# Altium PCB board.PcbDoc
Units mm, origin at the board's own origin, x right, y up, seen from the top; angles counter-clockwise.
Board outline 27 x 75 mm, 2 copper layers (Top Layer, Bottom Layer), stack 0.97 mm thick; 32 components, 35 nets, 168 pads, 13 vias.
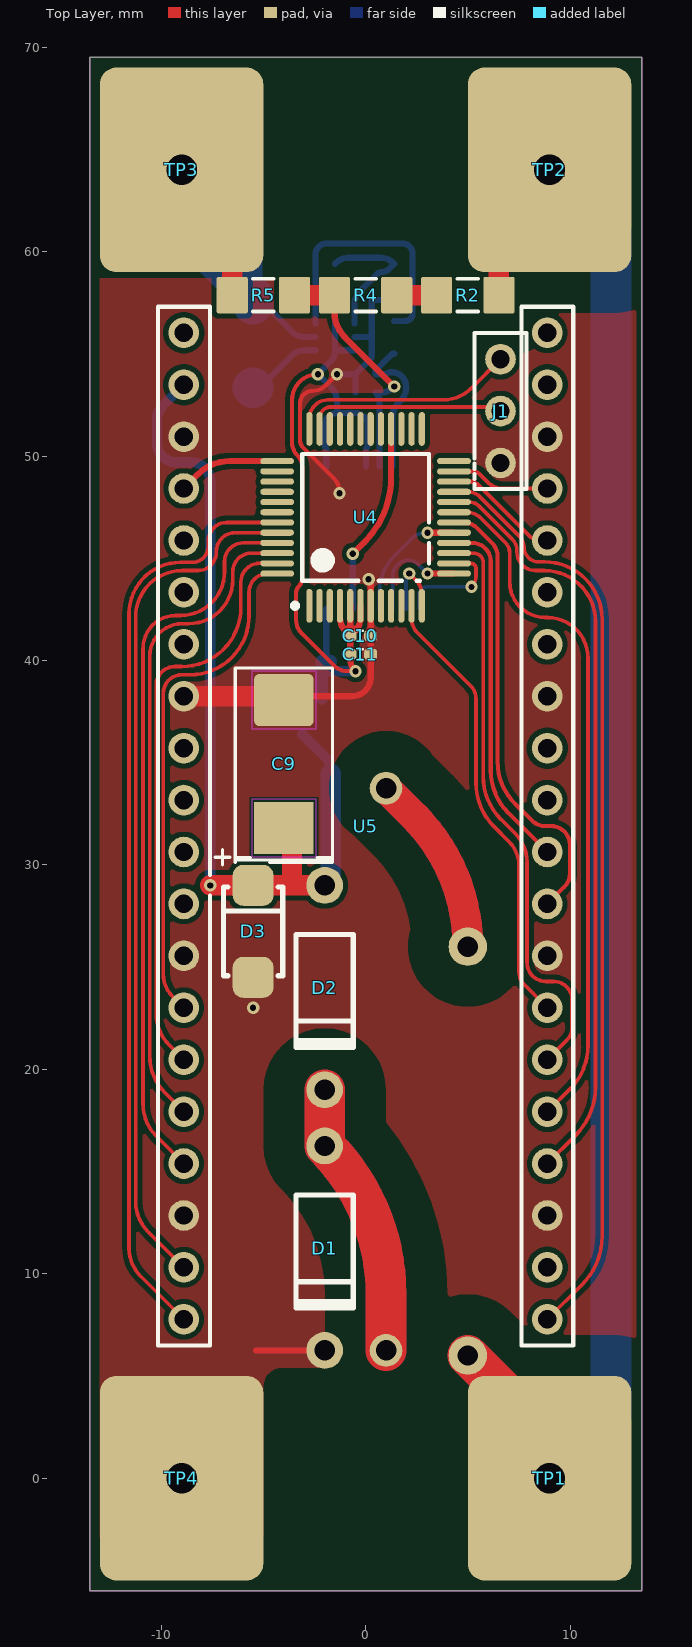
[diagram p0: Top Layer view]
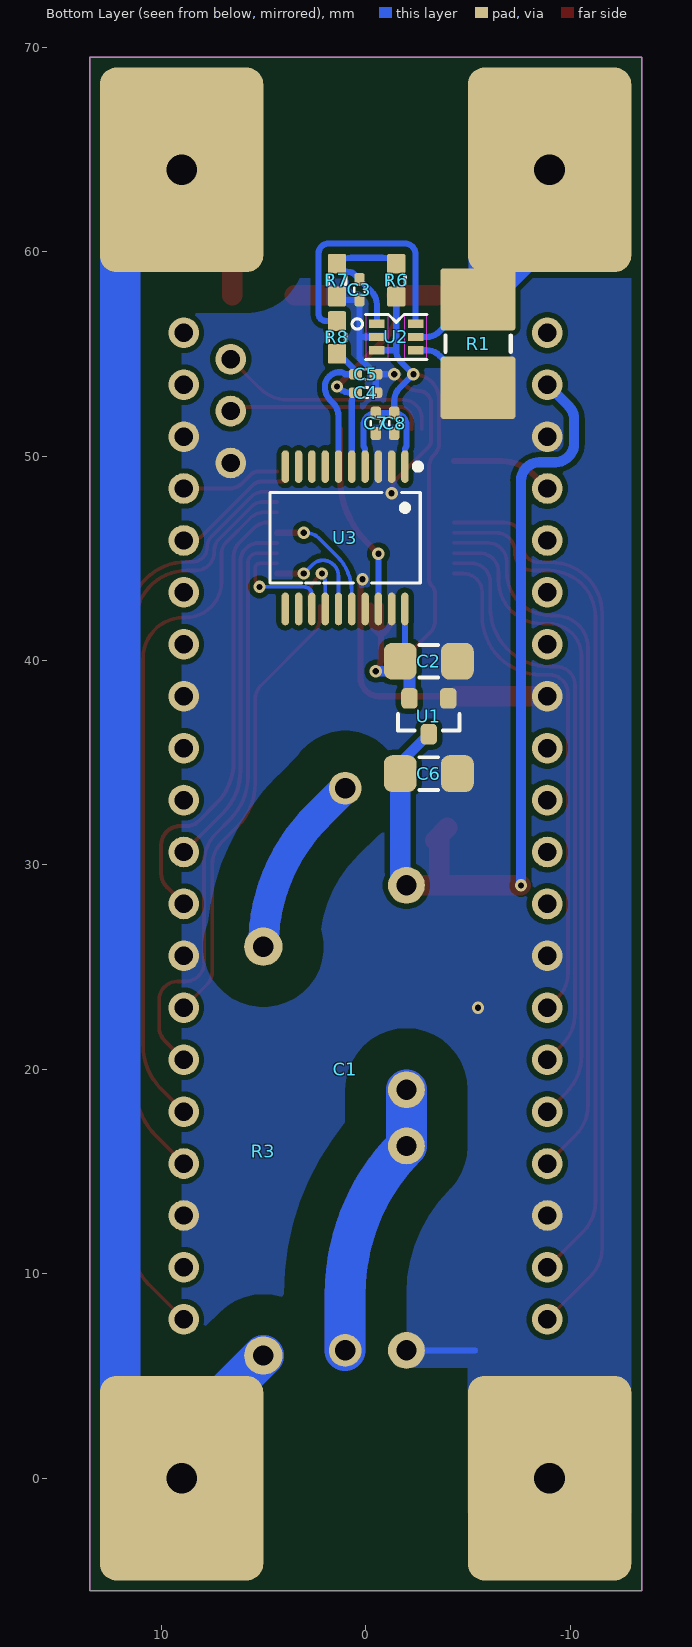
[diagram p1: Bottom Layer view, seen from below]
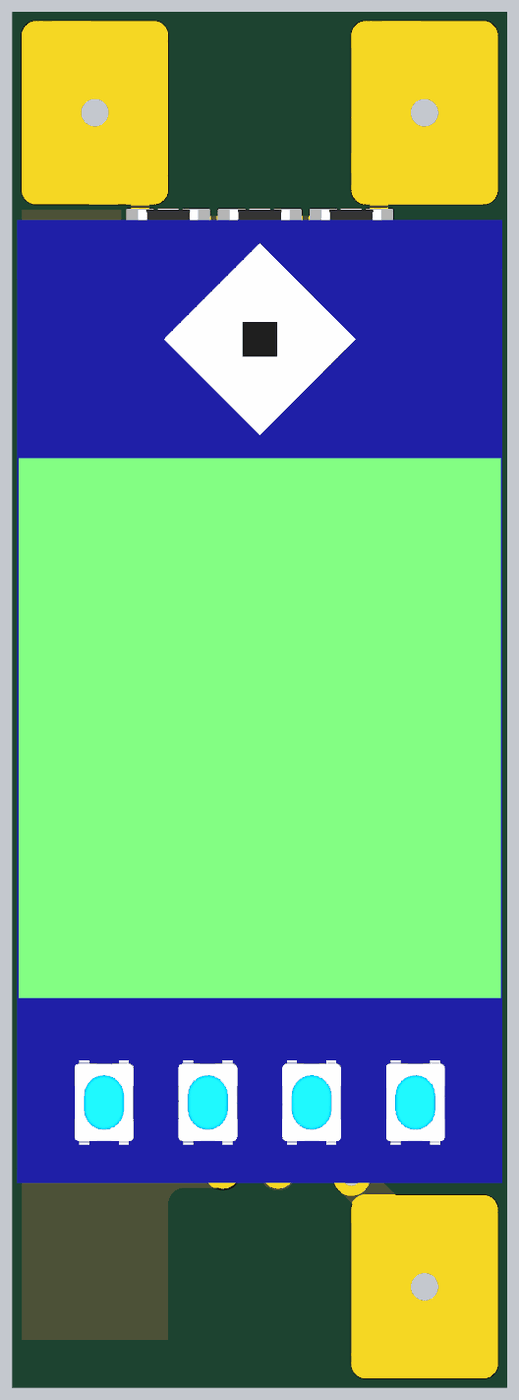
[diagram p2: 3D render of the assembled board from above, using the file's embedded part models]
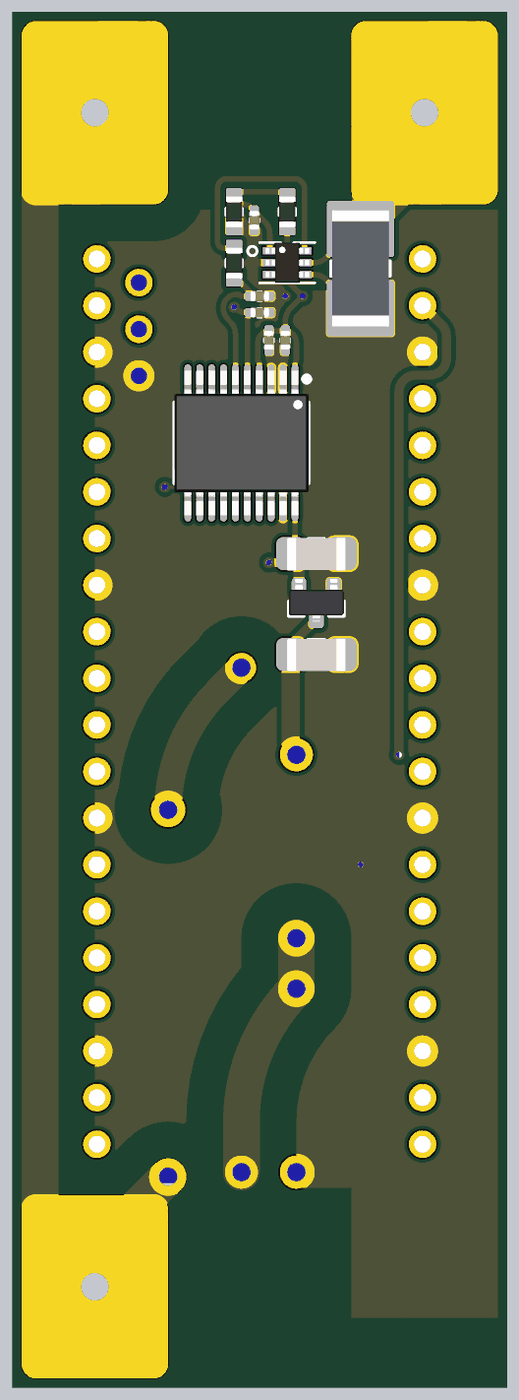
[diagram p3: 3D render of the assembled board from below, using the file's embedded part models]

## Layer stack, top to bottom
Top Solder: solder mask 0.0127, Solder Resist, Dk 3.8
Top Layer: signal copper 0.035
Dielectric: core 0.9, FR-4, Dk 4.5
Bottom Layer: signal copper 0.035
Bottom Solder: solder mask 0.0127, Solder Resist, Dk 3.8

## Board outline
-13.5,-5.5 -13.5,69.5 13.5,69.5 13.5,-5.5

## Design rules (kind name [scope] priority, off if disabled: settings)
AcuteAngle [All] p1: minimum=6.00000000000000E+0001 checktracksonly=FALSE
Clearance Clearance_1 [InNetClass('220')] p1: gap=2 ignorepadtopadclearanceinfootprint=FALSE except(0.13: Arc-Arc Arc-Track Arc-SMDPad Arc-Via Track-Track Track-SMDPad Track-Via SMDPad-SMDPad SMDPad-Via THPad-Via Via-Via; 0.15: Arc-THPad Arc-Text Arc-Hole Track-THPad Track-Text Track-Hole SMDPad-THPad SMDPad-Text SMDPad-Hole THPad-THPad THPad-Text THPad-Hole Via-Text Via-Hole Fill-Text Fill-Hole Poly-Text Poly-Hole Region-Text Region-Hole Text-Text Text-Hole)
Clearance [All] p2: gap=0.25 ignorepadtopadclearanceinfootprint=FALSE except(0.13: Arc-Arc Arc-Track Arc-SMDPad Arc-Via Track-Track Track-SMDPad Track-Via SMDPad-SMDPad SMDPad-Via THPad-Via Via-Via; 0.15: Arc-THPad Arc-Text Arc-Hole Track-THPad Track-Text Track-Hole SMDPad-THPad SMDPad-Text SMDPad-Hole THPad-THPad THPad-Text THPad-Hole Via-Text Via-Hole Fill-Text Fill-Hole Poly-Text Poly-Hole Region-Text Region-Hole Text-Text Text-Hole)
ComponentClearance ComponentClearance_1 [HasFootprint('HDR-1X3')] p1: gap=-1 collisioncheckmode=3 verticalgap=2540 showdistances=FALSE
ComponentClearance ComponentClearance_2 [HasFootprint('TP2030_SMD')] p2: gap=-1 collisioncheckmode=3 verticalgap=2540 showdistances=FALSE
ComponentClearance [All] p3: gap=0.3 collisioncheckmode=3 verticalgap=0.254 showdistances=FALSE
HoleSize [All] p1: absolutevalues=TRUE maxlimit=6 minlimit=0.2 maxpercent=80.000 minpercent=20.000
HoleToHoleClearance HoleToHoleClearance_1 [IsVia vs IsThruPin] p1: gap=0.7 allowstackedmicrovias=TRUE
HoleToHoleClearance [All] p2: gap=0.5 allowstackedmicrovias=TRUE
MinimumSolderMaskSliver [All] p1 off: minsoldermaskwidth=0.254
PlaneClearance [All] p1: clearance=0.45
PlaneConnect [All] p1: planeconnectstyle=Direct reliefexpansion=0.3 reliefentries=4 reliefconductorwidth=0.381 reliefairgap=0.178
PolygonConnect [All] p1: connectstyle=Direct reliefconductorwidth=0.381 reliefentries=4 polygonreliefangle="90 Angle" airgapwidth=0.356
RoutingVias [All] p1: holewidth=0.3 width=0.6 viastyle="Through Hole" minholewidth=0.2 minwidth=0.45 maxholewidth=0.9 maxwidth=1.27
SilkToSilkClearance [All] p1 off: silktosilkclearance=0.254
SilkToSolderMaskClearance [IsPad] p1 off: minsilkscreentomaskgap=0.254 clearancetoexposedcopper=TRUE
SolderMaskExpansion [All] p1: expansion=0.102 istentingtop=FALSE
UnRoutedNet [All] p1: checkbadconnections=TRUE
Width [All] p1: maxlimit=3.81 minlimit=0.14 preferedwidth=0.254
21 further rules are at their usual default settings.

## Classes and differential pairs
net class 220: NetC1_1 NetC1_2 NetR2_1 NetR2_2

## Components (designator, comment, footprint, x,y, rotation, side; value= is the part's Value field where it differs from the comment)
C1 "100nF" CAP-TH_27,5 1,20 r90 bottom
C2 "10uF" C1206 -3.094,39.965 r0 bottom
C3 "100nF" C0402 0.3,58.135 r90 bottom
C4 "100nF" C0402 0,53.1 r0 bottom
C5 "100nF" C0402 0,54 r0 bottom
C6 "10uF" C1206 -3.094,34.465 r0 bottom
C7 "100nF" C0402 -0.5,51.6 r90 bottom
C8 "100nF" C0402 -1.4,51.6 r90 bottom
C9 "100uF" C7343 -4,35 r90 top
C10 "100nF" C0402 -0.25,41.2 r180 top
C11 "100nF" C0402 -0.25,40.3 r180 top
D1 "" DO-41 -2,11.25 r90 top
D2 "" DO-41 -2,24 r90 top
D3 "" SMA -5.5,26.75 r90 top
J1 "SWD" HDR-1X3 6.6,52.2 r0 top
R1 "" R2512-WIDE -5.5,55.5 r270 bottom
R2 "" R1206 5,57.87 r0 top
R3 "" RES-TH_20 5,16 r270 bottom
R4 "" R1206 0,57.87 r0 top
R5 "" R1206 -5,57.87 r0 top
R6 "" R0603 -1.5,58.6 r270 bottom
R7 "" R0603 1.4,58.6 r90 bottom
R8 "" R0603 1.4,55.8 r90 bottom
TP1 "" TP2030_SMD#1 15,0 r90 top
TP2 "" TP2030_SMD#2 5,64 r90 top
TP3 "" TP2030_SMD#3 -9,64 r90 top
TP4 "" TP2030_SMD#4 -8,-12 r90 top
U1 "XC6206P332MR" SOT-23 -3.094,37.269 r90 bottom
U2 "INA199A2" SOT-363 -1.5,55.825 r270 bottom
U3 "MCP3561-E/ST" SSOP-20 1,46 r0 bottom
U4 "STM32G030C8T6" LQFP-48 0,47 r90 top
U5 "19650 WAVESHARE" DISP_19650_WS 0,31.9 r0 top

## Footprints (in the part's own frame and the unit in brackets; to place one, negate y for a bottom-side part, rotate by r counter-clockwise, add the part's x,y. Pads: shape width x height; smd on the part's side, far side on the other; paste and mask are expansions set on the pad)
C0402 [mm] "Chip Capacitor Body"
  rrect50% 0.635x0.508 smd mask+0.05: 1(-0.5,0) 2(0.5,0)
  silkscreen extent -0.1,-0.25 0.1,0.25, body extent -0.52,-0.27 0.53,0.28, height 0.55
C1206 [mm] "Chip Capacitor"
  rrect50% 1.6x1.8 smd: 1(-1.4,0) 2(1.4,0)
  silkscreen extent -0.45,-0.8 0.45,0.8, body extent -1.6,-0.88 1.6,0.92, height 1.6
C7343 [mm] "C7343_1"
  rect 2.55x2.9 smd: 1(-3.188,0)
  rrect20% 2.55x2.9 smd: 2(3.061,0)
  Top Layer keep-out region: 1.659,1.577 1.659,-1.577 4.464,-1.577 4.464,1.577
  Top Layer keep-out region: -4.591,1.577 -4.591,-1.577 -1.786,-1.577 -1.786,1.577
  silkscreen extent -5,-2.37 4.64,3.37, body extent -3.7,-2.22 3.7,2.22, height 3.01
CAP-TH_27,5 [mm]
  round 1.6 hole 1: 1(-13.75,0) 2(13.75,0)
DISP_19650_WS [mm]
  round 1.5 hole 0.9: 1(8.89,24.13) 2(8.89,21.59) 3(8.89,19.05) 4(8.89,16.51) 5(8.89,13.97) 6(8.89,11.43) 7(8.89,8.89) 8(8.89,6.35) 9(8.89,3.81) 10(8.89,1.27) 11(8.89,-1.27) 12(8.89,-3.81) 13(8.89,-6.35) 14(8.89,-8.89) 15(8.89,-11.43) 16(8.89,-13.97) 17(8.89,-16.51) 18(8.89,-19.05) 19(8.89,-21.59) 20(8.89,-24.13) 21(-8.89,-24.13) 22(-8.89,-21.59) 23(-8.89,-19.05) 24(-8.89,-16.51) 25(-8.89,-13.97) 26(-8.89,-11.43) 27(-8.89,-8.89) 28(-8.89,-6.35) 29(-8.89,-3.81) 30(-8.89,-1.27) 31(-8.89,1.27) 32(-8.89,3.81) 33(-8.89,6.35) 34(-8.89,8.89) 35(-8.89,11.43) 36(-8.89,13.97) 37(-8.89,16.51) 38(-8.89,19.05) 39(-8.89,21.59) 40(-8.89,24.13)
  silkscreen extent -10.16,-25.4 10.16,25.4, body extent -13.25,-26.25 13.25,26.25, height 18.24
DO-41 [mm]
  round 1.8 hole 1: 1(-5,0) 2(5,0)
  silkscreen extent -2.92,-1.4 2.6,1.4
HDR-1X3 [mm]
  round 1.5 hole 0.9: 1(0,2.54) 2(0,0) 3(0,-2.54)
  silkscreen extent -1.27,-3.81 1.27,3.81
LQFP-48 [mm]
  oval 1.65x0.3 smd: 1(-4.325,2.75) 2(-4.325,2.25) 3(-4.325,1.75) 4(-4.325,1.25) 5(-4.325,0.75) 6(-4.325,0.25) 7(-4.325,-0.25) 8(-4.325,-0.75) 9(-4.325,-1.25) 10(-4.325,-1.75) 11(-4.325,-2.25) 12(-4.325,-2.75) 25(4.325,-2.75) 26(4.325,-2.25) 27(4.325,-1.75) 28(4.325,-1.25) 29(4.325,-0.75) 30(4.325,-0.25) 31(4.325,0.25) 32(4.325,0.75) 33(4.325,1.25) 34(4.325,1.75) 35(4.325,2.25) 36(4.325,2.75)
  oval 0.3x1.65 smd: 13(-2.75,-4.325) 14(-2.25,-4.325) 15(-1.75,-4.325) 16(-1.25,-4.325) 17(-0.75,-4.325) 18(-0.25,-4.325) 19(0.25,-4.325) 20(0.75,-4.325) 21(1.25,-4.325) 22(1.75,-4.325) 23(2.25,-4.325) 24(2.75,-4.325) 37(2.75,4.325) 38(2.25,4.325) 39(1.75,4.325) 40(1.25,4.325) 41(0.75,4.325) 42(0.25,4.325) 43(-0.25,4.325) 44(-0.75,4.325) 45(-1.25,4.325) 46(-1.75,4.325) 47(-2.25,4.325) 48(-2.75,4.325)
  silkscreen extent -4.45,-3.1 3.1,3.57, body extent -4.5,-4.5 4.5,4.5, height 1.5
R0603 [mil] "Chip Resistor; Body 1.6 x 0.8 mm (LxW typ)"
  rrect20% 38x35.43 smd mask+1.97: 1(-31.5,0) 2(31.5,0)
  silkscreen extent -7,-17 7,17, body extent -33,-18 33,18, height 22
R1206 [mil] "Chip Resistor"
  rrect10% 60x70 smd mask+1.97: 1(-60,0) 2(60,0)
  silkscreen extent -20,-31 20,31, body extent -65,-33 65,33, height 26
R2512-WIDE [mm] "Chip Resistor; Body 6.4 x 3.2 mm (LxW typ)"
  rrect10% 3.05x3.68 smd mask+0.05: 1(-2.16,0) 2(2.16,0)
  silkscreen extent -0.4,-1.6 0.4,1.6, body extent -3.19,-1.55 3.16,1.55, height 0.55
RES-TH_20 [mm]
  round 1.88 hole 1: 1(-10,0) 2(10,0)
SMA [mm] "SMA(DO-214AC)"
  rrect50% 2x2 smd: 1(-2.25,0) 2(2.25,0)
  silkscreen extent -2.17,-1.45 2.17,1.45, body extent -2.78,-1.48 2.83,1.48, height 2.9
SOT-23 [mm]
  rrect50% 1x0.8 smd mask+0.05: 1(0.875,-0.95) 2(0.875,0.95) 3(-0.875,0)
  silkscreen extent -0.7,-1.5 0.1,1.5, body extent -1.27,-1.5 1.33,1.5, height 1.1
SOT-363 [mil]
  rect 16x30 smd: 1(-25.59,-37.4) 2(0,-37.4) 3(25.59,-37.4) 4(25.59,37.4) 5(0,37.4) 6(-25.59,37.4)
  Top Layer keep-out region: -40.5,59.06 -40.5,15.75 40.5,15.75 40.5,59.06
  Top Layer keep-out region: -40.5,-15.75 -40.5,-59.06 40.5,-59.06 40.5,-15.75
  silkscreen extent -43,-85 43,59, body extent -43,-47 43,47, height 43
SSOP-20 [mm]
  oval 0.364x1.6 smd: 1(-2.925,-3.482) 2(-2.275,-3.482) 3(-1.625,-3.482) 4(-0.975,-3.482) 5(-0.325,-3.482) 6(0.325,-3.482) 7(0.975,-3.482) 8(1.625,-3.482) 9(2.275,-3.482) 10(2.925,-3.482) 11(2.925,3.482) 12(2.275,3.482) 13(1.625,3.482) 14(0.975,3.482) 15(0.325,3.482) 16(-0.325,3.482) 17(-0.975,3.482) 18(-1.625,3.482) 19(-2.275,3.482) 20(-2.925,3.482)
  silkscreen extent -3.71,-3.63 3.68,2.22, body extent -3.66,-3.95 3.66,3.95, height 1.98
TP2030_SMD#1 [mm] "TP30_SMD"
  rrect20% 10x8 hole 1.5 mask+0.05: 1(0,6)
TP2030_SMD#2 [mm] "TP30_SMD"
  rrect20% 10x8 hole 1.5 mask+0.05: 1(0,-4)
TP2030_SMD#3 [mm] "TP30_SMD"
  rrect20% 10x8 hole 1.5 mask+0.05: 1(0,0)
TP2030_SMD#4 [mm] "TP30_SMD"
  rrect20% 10x8 hole 1.5 mask+0.05: 1(12,1)

## Part data
C1 C2 C3 C4 C5 C6 C7 C8 C10 C11: library part CAP
C9: library part 220uF
D1 D2 D3: library part US1M-13-F
J1: library part "Header 3"
R1 R2 R3 R4 R5 R6 R7 R8: library part RES
TP1 TP2 TP3 TP4: library part TP_Dup1
U1: library part Component_4_1
U2: library part MCP65R41T-2402

## Via types
v1: diameter 0.6, hole 0.3, Top Layer to Bottom Layer, tented both sides, 13 vias

## Nets (pads, with @x,y where several pads share a name; then routed paths per layer and width w, separated by ;. In a path a pad name is that pad's centre, name@x,y a point inside that pad or via, vN(x,y) a via of type N, cw(c..) or ccw(c..) an arc to the next point about the centre after c; other vN are vias at no path point)
3V3: C2.2 C7.2 C8.2 C10.2 C11.2 R6.2 U1.2 U2.3 U3.1 U3.4 U3.20 U4.4 U4.5 U4.6 | length 44.4
  Top Layer w0.2: -3.35,50.05 cw(c-3.954,49.446) -3.1,49.446 -3.1,44.012 cw(c-3.612,44.012) -3.25,43.65 ccw(c-2.888,43.288) -3.4,43.288 -3.4,41.979 ccw(c-2.486,41.979) -3.132,41.332 -1.542,39.742 ccw(c-0.896,40.389) -0.896,39.475 v1(-0.499,39.475) ; -3.351,50.051 cw(c-2.746,50.654) -3.6,50.654 -3.6,52.736 cw(c-2.336,52.736) v1(-2.336,54)
  Top Layer w0.3: U4.4 -1.25,42.079 ccw(c-0.336,42.079) -0.982,41.432 C10.2 ; U4.5 C10.2 ; v1(-0.499,39.475) cw(c0.107,40.08) -0.75,40.08 C11.2 C10.2 ; U4.6 -0.25,42.079 cw(c-1.164,42.079) -0.518,41.432 C10.2
  Bottom Layer w0.3: U3.20 -1.925,40.522 ccw(c-1.136,40.522) C2.2 ; U3.1 -1.925,50.326 ccw(c-2.036,50.326) -1.957,50.405 cw(c-1.855,50.507) -2,50.507 -2,51.5 cw(c-1.4,51.5) C8.2 ; R6.2 -1.5,55.175 ; U2.3 -1.5,55.175 ; U3.4 0.025,50.326 cw(c0.136,50.326) 0.057,50.405 ccw(c-0.045,50.507) 0.1,50.507 0.1,51.5 ccw(c-0.5,51.5) C7.2 C8.2 ; -1.5,55.175 -1.5,55.13 cw(c-2.208,55.13) -1.707,54.629 v1(-2.336,54) -1.668,53.331 cw(c-2.314,52.685) -1.4,52.685 C8.2
  Bottom Layer w0.5: C2.2@-2.199,39.475 -2.144,39.475 v1(-0.499,39.475)
  Bottom Layer w0.6: U1.2 -2.144,39.475 -2.144,39.965 C2.2
5V: C6.2 C9.1 D2.2 D3.2 U1.3 U5.39 | length 43.4
  Top Layer w1: v1(-7.6,29) D3.2 D2.2 ; C9.1 C9.1@-3.4,31.212 ; -3.6,29 C9.1@-3.6,31.212
  Bottom Layer w0.5: U5.39 -9.932,52.448 ccw(c-9.286,51.801) -10.2,51.801 -10.2,50.614 ccw(c-9.286,50.614) -9.286,49.7 -8.514,49.7 cw(c-8.514,48.786) -7.6,48.786 v1(-7.6,29) ; U1.3 C6.2@-1.962,35.262 ; C6.2@-1.962,35.262 cw(c-2.608,34.616) -1.694,34.616 C6.2
  Bottom Layer w1: D2.2@-1.962,29.038 ccw(c-2.608,29.685) -1.694,29.685 C6.2
B0: U4.23 U5.4 | length 4.9
  Top Layer w0.2: U4.23 5.238,49.25 cw(c5.238,48.738) 5.6,49.1 6.022,48.678 ccw(c6.669,49.324) 6.669,48.41 U5.4
  Top Layer w0.3: U5.4@8.866,48.4 ccw(c8.866,48.434) U5.4
B1: U4.45 U5.24 | length 35.7
  Top Layer w0.18: U5.24 -10.259,16.759 cw(c-8.75,18.268) -10.884,18.268 -10.884,40.603 cw(c-9.287,40.603) -9.287,42.2 -9.043,42.2 ccw(c-9.043,44.343) -6.9,44.343 -6.9,44.836 cw(c-5.986,44.836) -5.986,45.75 U4.45
B2: U4.47 U5.26 | length 28.6
  Top Layer w0.18: U5.26 -9.594,21.174 cw(c-8.017,22.75) -10.246,22.75 -10.246,38.786 cw(c-9.332,38.786) -9.332,39.7 -8.989,39.7 ccw(c-8.989,42.589) -6.1,42.589 -6.1,43.836 cw(c-5.186,43.836) -5.186,44.75 U4.47
B3: U4.43 U5.21 | length 45.5
  Top Layer w0.18: U5.21 -11.004,9.884 cw(c-9.635,11.252) -11.571,11.252 -11.571,42.285 cw(c-9.056,42.285) -9.056,44.8 -8.468,44.8 ccw(c-8.468,45.568) -7.7,45.568 -7.7,45.836 cw(c-6.786,45.836) -6.786,46.75 U4.43
B4: U4.22 U5.5 | length 6
  Top Layer w0.2: U4.22@4.025,48.75 5.11,48.75 cw(c5.11,48.179) 5.514,48.583 7.959,46.138 ccw(c8.606,46.784) 8.606,45.87 U5.5
B5: U4.21 U5.20 | length 45.7
  Top Layer w0.18: U4.21 4.996,48.25 cw(c4.996,47.396) 5.6,48 7.532,46.068 cw(c6.998,45.534) 7.753,45.534 ccw(c8.464,45.534) 8.464,44.823 8.758,44.823 cw(c8.758,42.011) 11.571,42.011 11.571,11.841 cw(c8.214,11.841) 10.587,9.467 U5.20
B6: U4.44 U5.22 | length 42
  Top Layer w0.18: U5.22 -10.638,12.058 cw(c-9.162,13.535) -11.25,13.535 -11.25,42.124 cw(c-8.975,42.124) -8.975,44.4 -8.196,44.4 ccw(c-8.196,45.296) -7.3,45.296 -7.3,45.336 cw(c-6.386,45.336) -6.386,46.25 U4.44
B7: U4.46 U5.25 | length 32.1
  Top Layer w0.18: U5.25 -9.815,18.855 cw(c-8.012,20.659) -10.562,20.659 -10.562,40.203 cw(c-8.965,40.203) -8.965,41.8 -8.643,41.8 ccw(c-8.643,43.943) -6.5,43.943 -6.5,44.336 cw(c-5.586,44.336) -5.586,45.25 U4.46
B8: U4.48 U5.27 | length 25.1
  Top Layer w0.18: U5.27 -9.432,23.552 cw(c-8.303,24.681) -9.9,24.681 -9.9,38.386 cw(c-8.986,38.386) -8.986,39.3 -8.589,39.3 ccw(c-8.589,42.189) -5.7,42.189 -5.7,43.336 cw(c-4.786,43.336) -4.786,44.25 U4.48
CS: U3.13 U4.14 | length 5.7
  Top Layer w0.18: U4.14 5.15,44.75 cw(c5.15,44.5) 5.4,44.5 5.4,44.12 cw(c4.665,44.12) v1(5.185,43.6)
  Top Layer w0.3: v1@5.181,43.597 v1@5.185,43.592
  Bottom Layer w0.18: U3.13 2.625,43.225 cw(c3,43.225) 3,43.6 v1(5.185,43.6)
D_BL: U4.20 U5.17 | length 37.4
  Top Layer w0.18: U4.20 5.067,47.75 cw(c5.067,47.067) 5.55,47.55 7.188,45.912 cw(c6.676,45.4) 7.4,45.4 7.4,45.314 ccw(c8.314,45.314) 8.314,44.4 8.738,44.4 cw(c8.738,41.887) 11.25,41.887 11.25,19.142 cw(c7.89,19.142) 10.266,16.766 U5.17
D_CLK: U4.11 U5.14 | length 22.1
  Top Layer w0.18: U4.11 2.25,42.029 ccw(c3.164,42.029) 2.518,41.382 5.132,38.768 cw(c4.486,38.121) 5.4,38.121 5.4,33.993 ccw(c8.396,33.993) 6.277,31.875 7.018,31.134 cw(c5.855,29.971) 7.5,29.971 7.5,24.779 ccw(c8.414,24.779) 7.768,24.132 U5.14
D_CS: U4.18 U5.12 | length 21.7
  Top Layer w0.2: U4.18@4.805,46.75 cw(c4.805,45.836) 5.452,46.482 6.187,45.747 cw(c5.54,45.101) 6.455,45.101 6.455,35.056 ccw(c9.376,35.056) 7.31,32.99 8.132,32.168 ccw(c8.779,32.814) 8.779,31.9 9.067,31.9 cw(c9.067,30.967) 10,30.967 10,29.579 cw(c9.086,29.579) 9.732,28.932 U5.12
D_DC: U4.16 U5.11 | length 17.5
  Top Layer w0.2: U4.16 5.21,45.75 cw(c5.21,44.836) 6.124,44.836 6.124,34.606 ccw(c9.045,34.606) 6.98,32.54 U5.11
D_DIN: U4.15 U5.15 | length 28.6
  Top Layer w0.18: U4.15 5.286,45.25 cw(c5.286,44.781) 5.755,44.781 5.755,34.339 ccw(c8.75,34.339) 6.632,32.22 7.306,31.546 cw(c5.873,30.113) 7.9,30.113 7.9,25.214 ccw(c8.814,25.214) 8.814,24.3 9.2,24.3 cw(c9.2,23.4) 10.1,23.4 10.1,22.059 cw(c9.186,22.059) 9.832,21.412 U5.15
D_EN: U4.37 U5.37 | length 5
  Top Layer w0.3: U5.37 -8.176,49.124 cw(c-6.665,47.614) -6.665,49.75 U4.37
D_RST: U4.19 U5.16 | length 33.9
  Top Layer w0.18: U4.19 4.937,47.25 cw(c4.937,46.254) 5.642,46.958 6.834,45.766 cw(c6.311,45.244) 7.05,45.244 7.05,43.845 ccw(c8.795,43.845) 8.795,42.1 8.898,42.1 cw(c8.898,40.114) 10.884,40.114 10.884,21.149 cw(c7.927,21.149) 10.018,19.058 U5.16
GND: C2.1 C3.1 C4.1 C5.1 C6.1 C7.1 C8.1 C9.2 C10.1 C11.1 D1.1 D3.1 J1.3 R1.2 R7.1 TP4.1 U1.1 U2.2 U2.4 U3.2 U3.3 U3.19 U4.7 U5.3 U5.8 U5.13 U5.18 U5.23 U5.28 U5.33 U5.38 | length 40.2
  Top Layer w0.2: v1(-1.4,54) -1.948,53.452 cw(c-2.595,54.098) -2.595,53.184 ccw(c-2.595,52.576) -3.202,52.576 -3.202,50.759 ccw(c-2.707,50.759) -3.057,50.409 -1.543,48.894 cw(c-2.189,48.248) -1.275,48.248 v1(-1.275,48.182)
  Top Layer w0.3: -5.359,6.25 D1.1@-2.009,6.25 ; C9.2@-4.455,38.25 -0.664,38.25 ccw(c-0.664,39.164) 0.25,39.164 U4.7 v1@0.25,43.975
  Top Layer w1: U5.33 C9.2@-4.455,38.25
  Bottom Layer w0.3: R1.2 ccw(c-5.5,54.093) -4.968,53.561 -3.621,54.907 cw(c-2.974,54.261) -2.974,55.175 U2.4 ; -5.35,6.25 D1.1 ; v1(-1.4,54) C5.1 ; U2.2 0.294,55.825 ; C4.1 C5.1 ; R7.1 cw(c1.001,58.198) 1.001,57.635 C3.1 0.3,54.9 cw(c0.059,54.9) 0.229,54.729 C5.1
  other v1: -5.5,23.01 0.15,43.975
MCLK: U3.18 U4.28 | length 9.4
  Top Layer w0.3: v1(-0.625,45.218) -0.065,45.778 ccw(c-3.238,48.952) 1.25,48.952 U4.28
  Bottom Layer w0.3: U3.18 v1(-0.625,45.218)
MISO: U3.16 U4.17 | length 6.1
  Top Layer w0.3: v1(3.025,46.25) U4.17
  Bottom Layer w0.18: U3.16 0.675,43.359 cw(c3.127,43.359) 1.393,45.093 2.282,45.982 cw(c2.929,45.336) 2.929,46.25 v1(3.025,46.25)
MOSI: U3.15 U4.13 | length 5.3
  Top Layer w0.3: v1(3.025,44.25) U4.13
  Bottom Layer w0.18: U3.15 1.325,44.125 cw(c2.1,44.125) 2.1,44.9 cw(c2.1,44.236) 2.569,44.706 v1(3.025,44.25)
NetC1_1: C1.1 D1.2 D2.1 | length 27.1
  Top Layer w2: D2.1 D1.2 cw(c-9.243,9.007) 1,9.007 C1.1
  Bottom Layer w2: D2.1 D1.2 cw(c-9.243,9.007) 1,9.007 C1.1
NetC1_2: C1.2 R3.1 | length 18
  Top Layer w1.5: C1.2 2.348,32.402 cw(c-4.053,26) R3.1
  Bottom Layer w1.5: C1.2 2.348,32.402 cw(c-4.053,26) R3.1
NetC3_2: C3.2 R6.1 R7.2 U2.1 | length 6.9
  Bottom Layer w0.3: R6.1 -1.468,59.432 cw(c-0.821,58.786) -0.821,59.7 0.721,59.7 cw(c0.721,58.786) R7.2@1.368,59.432 ; U2.1 -0.55,57.406 cw(c0.364,57.406) -0.282,58.053 C3.2 0.57,58.905 cw(c0.8,58.675) 0.8,59 ccw(c0.8,59.483) 1.141,59.141 R7.2
NetC4_2: C4.2 R4.1 R5.2 U3.5 | length 12.2
  Top Layer w0.3: R4.1 -1.524,57.051 ccw(c0.231,57.051) -1.01,55.81 v1(1.4,53.4)
  Top Layer w1: R5.2 R4.1
  Bottom Layer w0.3: U3.5 0.675,52.678 ccw(c0.078,52.678) C4.2 0.721,53.1 ccw(c0.721,54.014) 1.368,53.368 v1(1.4,53.4)
NetC5_2: C5.2 R8.1 U3.6 | length 7.5
  Bottom Layer w0.3: U3.6 1.325,51.946 cw(c2.239,51.946) 1.593,52.593 1.721,52.721 ccw(c1.075,53.368) 1.989,53.368 1.989,53.387 ccw(c1.276,53.387) 1.241,54.1 ccw(c1.241,53.759) 1,54 C5.2 0.5,54.191 1.309,55 R8.1
NetR1_1: R1.1 R5.1 TP3.1 U2.5 | length 18.7
  Top Layer w1: TP3.1 -6.792,61.792 cw(c-7.438,61.145) -6.524,61.145 R5.1
  Bottom Layer w0.3: R1.1 cw(c-5.5,56.907) -4.968,57.439 -3.621,56.093 ccw(c-2.974,56.739) -2.974,55.825 U2.5
  Bottom Layer w2: TP3.1 -9,61.295 R1.1@-5.5,57.795 ; R1.1@-5.5,57.439 -5.5,57.5 R1.1
NetR2_1: R2.1 R4.2 | length 2
  Top Layer w1: R4.2 R2.1
NetR2_2: R2.2 R3.2 TP1.1 TP2.1 | length 86.5
  Top Layer w1: R2.2 6.524,61.145 cw(c7.438,61.145) 6.792,61.792 TP2.1
  Top Layer w2: R3.2 8.732,2.268 cw(c8.086,1.621) 9,1.621 TP1.1
  Bottom Layer w2: R3.2 TP1.1@8.732,2.268 ; TP1.1 12,3 12,61 TP2.1
NetR8_2: R8.2 U2.6 | length 12.8
  Bottom Layer w0.3: U2.6 -2.45,59.85 cw(c-1.9,59.85) -1.9,60.4 1.8,60.4 cw(c1.8,59.9) 2.3,59.9 2.3,56.955 cw(c1.957,56.955) 1.957,56.612 1.4,56.612 R8.2
SCK: U3.14 U4.12 | length 3.6
  Top Layer w0.18: v1(2.139,44.25) 2.482,43.907 cw(c1.836,43.26) 2.75,43.26 U4.12
  Bottom Layer w0.18: U3.14 1.975,43.854 cw(c2.535,43.854) v1(2.139,44.25)
SWCLK: J1.1 U4.36 | length 11.1
  Top Layer w0.18: U4.36 -2.75,51.833 cw(c-1.836,51.833) -1.836,52.747 3.795,52.747 ccw(c3.795,54.707) 5.181,53.321 J1.1
SWDIO: J1.2 U4.35 | length 10.1
  Top Layer w0.18: U4.35@-2.282,51.694 U4.35 -2.25,51.84 cw(c-1.69,51.84) -1.69,52.401 6.115,52.401 cw(c6.115,51.715) J1.2
pads on no net: U3.7 U3.8 U3.9 U3.10 U3.11 U3.12 U3.17 U4.1 U4.2 U4.3 U4.8 U4.9 U4.10 U4.24 U4.25 U4.26 U4.27 U4.29 U4.30 U4.31 U4.32 U4.33 U4.34 U4.38 U4.39 U4.40 U4.41 U4.42 U5.1 U5.2 U5.6 U5.7 U5.9 U5.10 U5.19 U5.29 U5.30 U5.31 U5.32 U5.34 U5.35 U5.36 U5.40

## Polygon pours and split planes (outlines as drawn)
GND on Bottom Layer "NONET_L02_P-001" (solid, remove dead copper, pour order 1): -5.007,5.4 -5.007,-1.7 -13,-1.7 -13,58.7 14.4,58.7 14.4,5.4
GND on Top Layer "NONET_L02_P-001" (solid, remove dead copper, pour order 0): -4.093,5.4 ccw(c-4.093,4.486) -5.007,4.486 -5.007,-2.9 -13,-2.9 -13,58.7 14.4,58.7 14.4,5.4

## Keep-outs
Keep-Out Layer:
  the board outline again, w0

## Other copper
Top Layer:
  rectangle net 3V3: -1.1,41.479 -0.424,41.7
Bottom Layer:
  rectangle net NetR1_1: -6.4,58.325 -5.031,63
  pour cut-out: -2.775,54.3 ccw(c-2.775,55.214) -2.129,54.568 -1.9,54.796 ccw(c-2.383,55.279) -1.7,55.279 -1.7,56.2 -7.1,56.2 -7.1,54.3